# EAGLE board DMXtoMotionPCB-v2 (EAGLE 7.5.0)
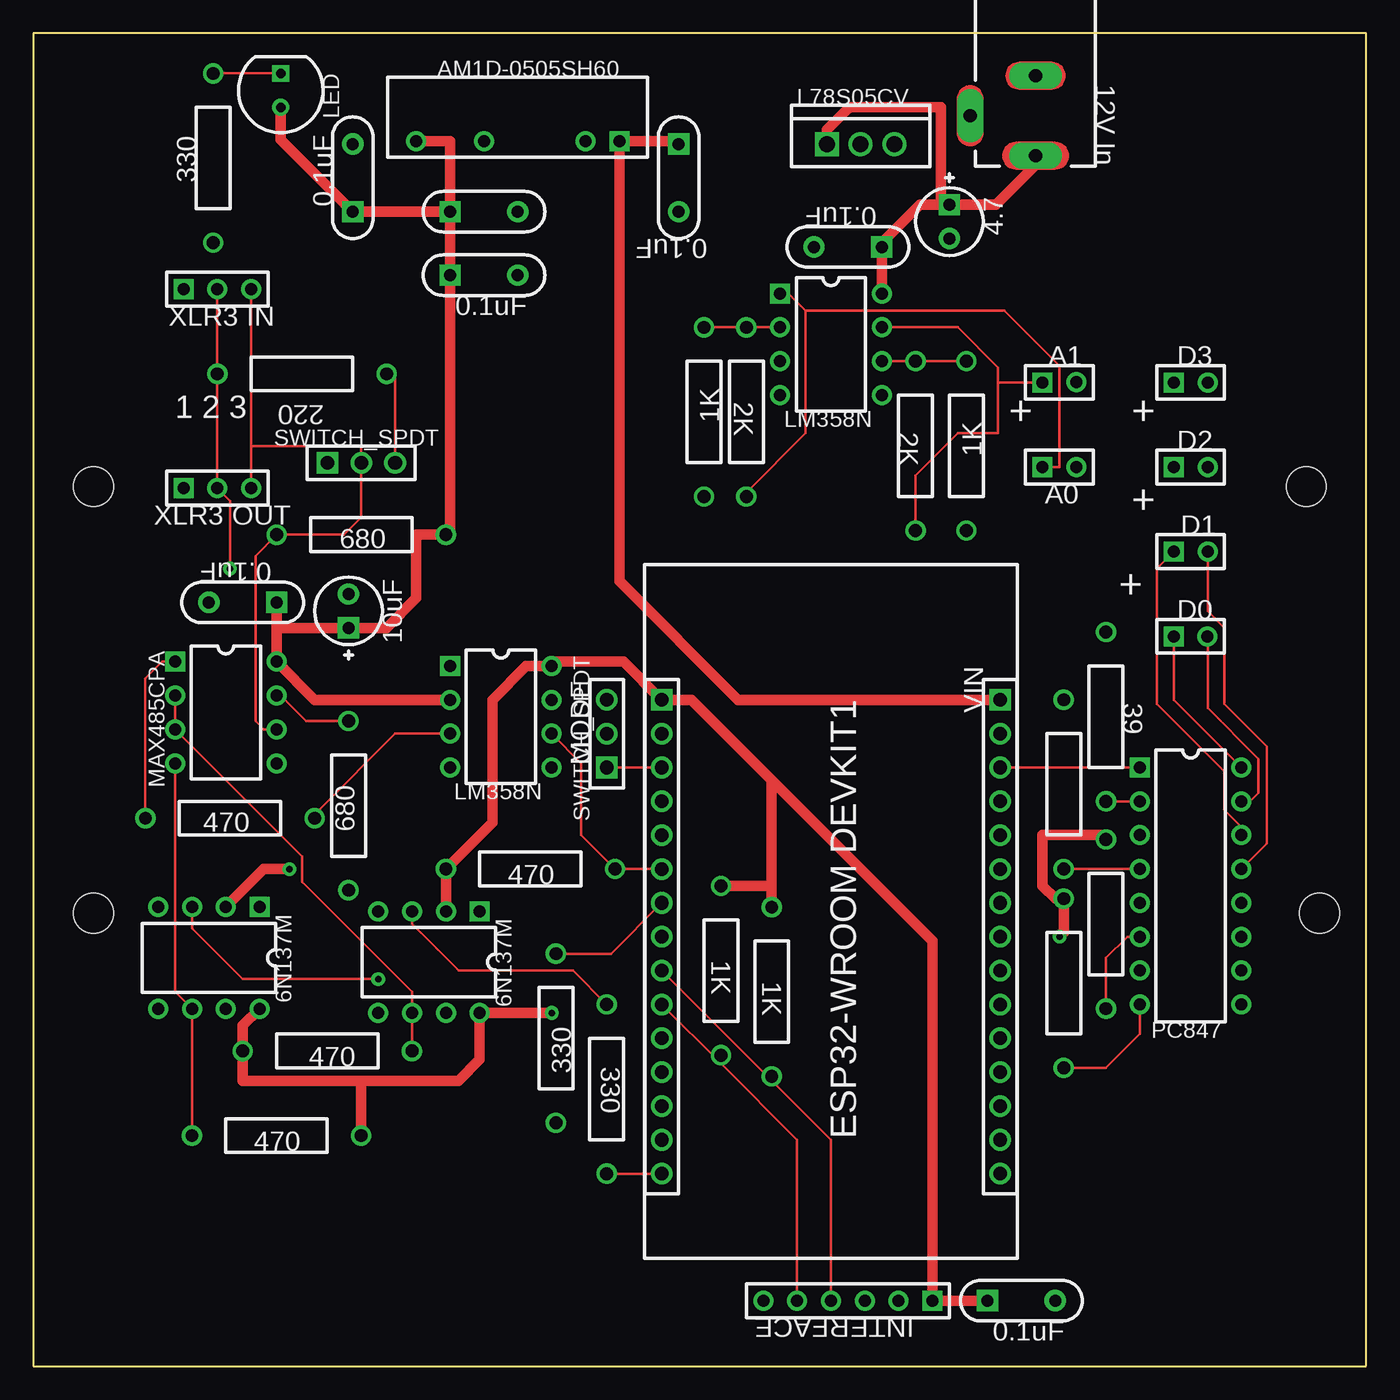
[diagram p0: board, top side]
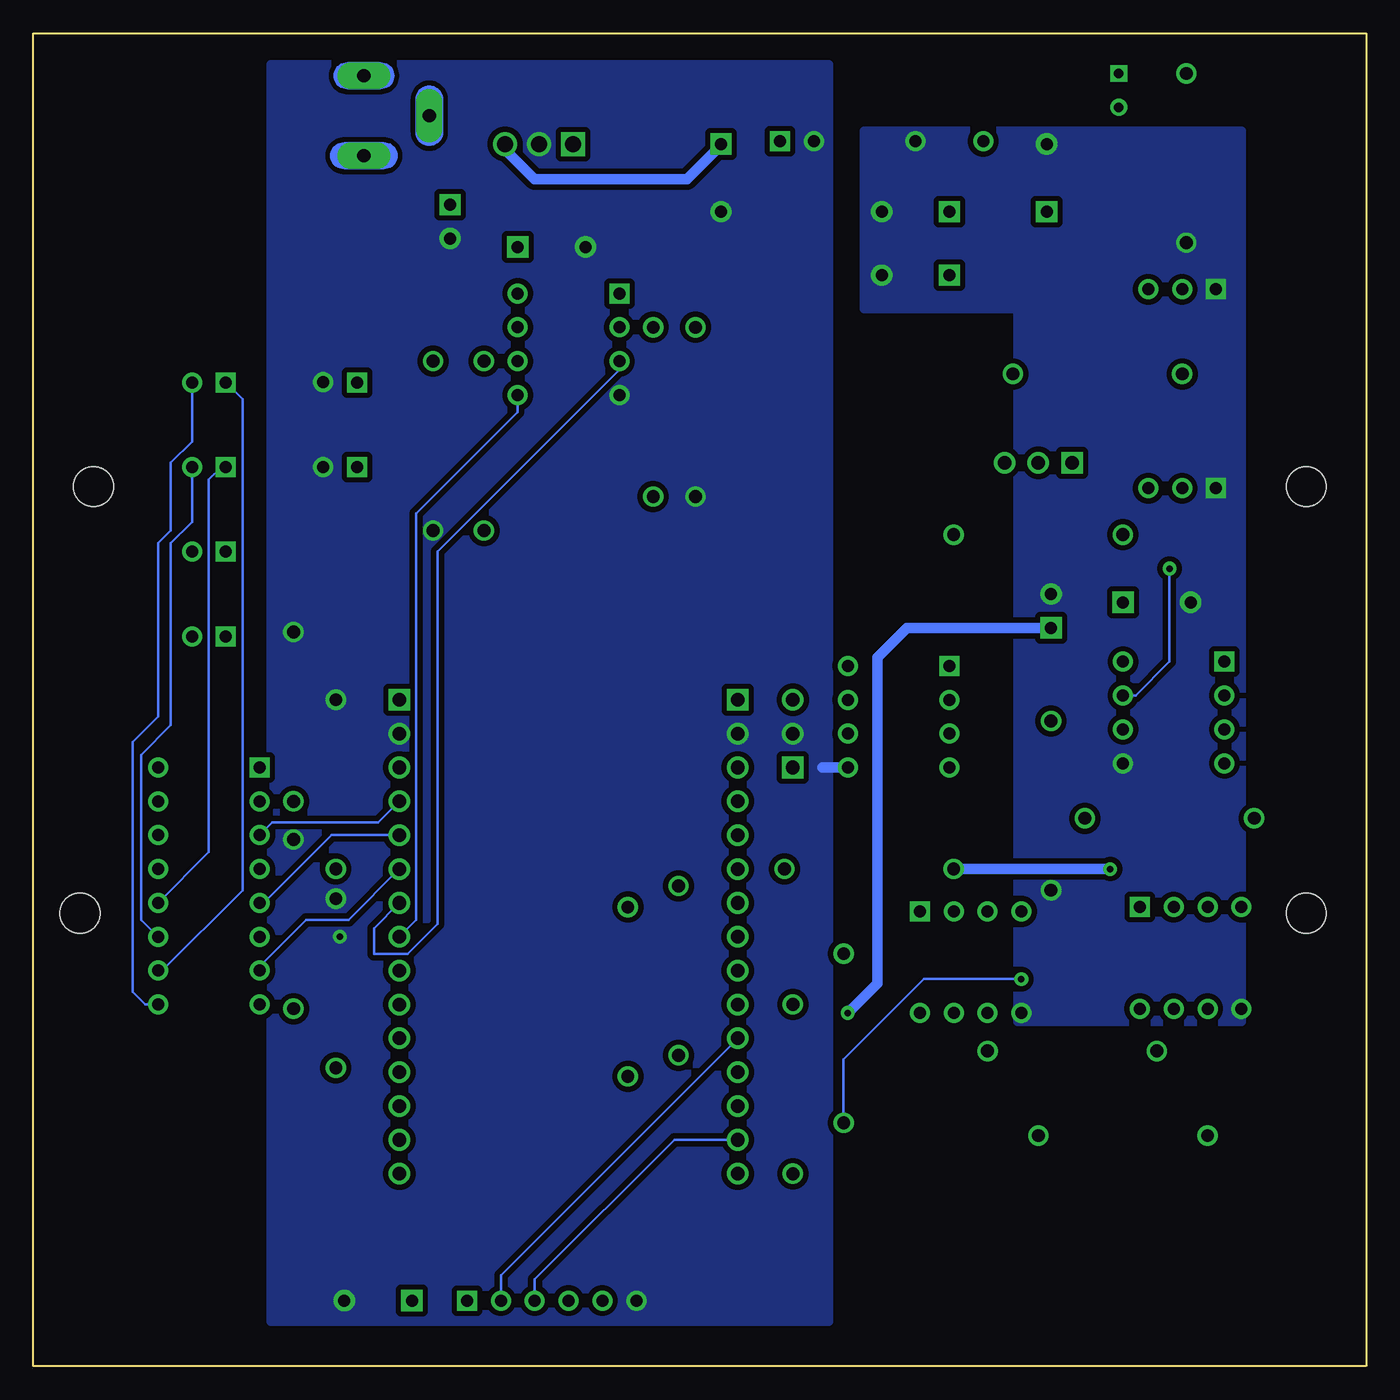
[diagram p1: board, bottom side, seen from below]

Size 100 x 100 mm. Coordinates in mm from the lower left corner, seen from the top.
Outline: 0,100 0,0 100,0 100,100 0,100
Copper layers (1*16): Top 0.035mm / dielectric 1.5mm / Bottom 0.035mm
Design rules "default *": minimum track width 10mil, minimum drill 0.61mm, track to track 8mil, track to pad 8mil, pad to pad 8mil, via to via 8mil, smd to smd 8mil, copper to edge 40mil, drill to drill 8mil, minimum pad ring 0mil, minimum via ring 8mil, stop-mask expansion 2mil, vias tented up to drill 19mil, thermal gap 10mil
Net classes: 0 Default: width 0.2 mm, clearance 0.2 mm, clearance 0.2 mm to class 1; 1 POWER: width 0.8 mm, clearance 0.4 mm, clearance 0.4 mm to class 0
Holes 3 mm at 4.5,66 4.5,34 95.5,66 96.5,34

## Footprints (pad centres in the part's own frame; a part is rotated, then mirrored left to right if it is on the bottom)
CAP-5.08/9.15x3 = drill 0.9 pad 1.6 square: 1 -2.54,0 | drill 0.9 pad 1.6: 2 2.54,0
CAP-5.08/9.15x3_C2 = drill 0.9 pad 1.6 square: 1 -2.54,0 | drill 0.9 pad 1.6: 2 2.54,0
CAP-5.08/9.15x3_C3 = drill 0.9 pad 1.6 square: 1 -2.54,0 | drill 0.9 pad 1.6: 2 2.54,0
CAPPR-2.54/5.08 = drill 0.9 pad 1.6 square: 1 -1.27,0 | drill 0.9 pad 1.6: 2 1.27,0
CAPPR-2.54/5.08_C5 = drill 0.9 pad 1.6 square: 1 -1.27,0 | drill 0.9 pad 1.6: 2 1.27,0
CAP-5.08/9.15x3_C9 = drill 0.9 pad 1.6 square: 1 -2.54,0 | drill 0.9 pad 1.6: 2 2.54,0
LED100 = drill 0.711 pad 1.27 square: 1 -1.27,0 | drill 0.711 pad 1.27: 2 1.27,0
4840-2211 = drill 1 pad 2 long: 1 3,1.7; 2 -3,1.7; 3 0,-3.2
HDR-1x3 = drill 0.9 pad 1.5 square: 1 -2.54,0 | drill 0.9 pad 1.5: 2 0,0; 3 2.54,0
HDR-1x2 = drill 0.9 pad 1.5 square: 1 -1.27,0 | drill 0.9 pad 1.5: 2 1.27,0
HDR-1x6 = drill 0.9 pad 1.5 square: 1 -6.35,0 | drill 0.9 pad 1.5: 2 -3.81,0; 3 -1.27,0; 4 1.27,0; 5 3.81,0; 6 6.35,0
HDR-1x2_J6 = drill 0.9 pad 1.5 square: 1 -1.27,0 | drill 0.9 pad 1.5: 2 1.27,0
RES-12.7/7.6x2.5 = drill 0.965 pad 1.524: 1 -6.35,0; 2 6.35,0
RES-12.7/7.6x2.5_R2 = drill 0.965 pad 1.524: 1 -6.35,0; 2 6.35,0
RES-12.7/7.6x2.5_R3 = drill 0.965 pad 1.524: 1 -6.35,0; 2 6.35,0
RES-12.7/7.6x2.5_R9 = drill 0.965 pad 1.524: 1 -6.35,0; 2 6.35,0
RES-12.7/7.6x2.5_R12 = drill 0.965 pad 1.524: 1 -6.35,0; 2 6.35,0
RES-12.7/7.6x2.5_R14 = drill 0.965 pad 1.524: 1 -6.35,0; 2 6.35,0
HDRF-1x3T/2.54/8x3 = drill 1.02 pad 1.62 square: 1 -2.54,0 | drill 1.02 pad 1.62: 2 0,0; 3 2.54,0
SIP-4(7)/19.5x6x2.54 = drill 0.9 pad 1.5 square: 1 -7.62,0 | drill 0.9 pad 1.5: 2 -5.08,0; 5 2.54,0; 7 7.62,0
DIP-8 = drill 0.9 pad 1.5 square: 1 -3.81,3.81 | drill 0.9 pad 1.5: 2 -3.81,1.27; 3 -3.81,-1.27; 4 -3.81,-3.81; 5 3.81,-3.81; 6 3.81,-1.27; 7 3.81,1.27; 8 3.81,3.81
TO-220V = drill 1.2 pad 1.8 square: 1 -2.54,0 | drill 1.2 pad 1.8: 2 2.54,0; 3 0,0
DIP-8_U5 = drill 0.9 pad 1.5 square: 1 -3.81,3.81 | drill 0.9 pad 1.5: 2 -3.81,1.27; 3 -3.81,-1.27; 4 -3.81,-3.81; 5 3.81,-3.81; 6 3.81,-1.27; 7 3.81,1.27; 8 3.81,3.81
ESP32-DEVKITV1 = drill 1.02 pad 1.62 square: 1 -17.78,-12.7; 30 -17.78,12.7 | drill 1.02 pad 1.62: 2 -15.24,-12.7; 3 -12.7,-12.7; 4 -10.16,-12.7; 5 -7.62,-12.7; 6 -5.08,-12.7; 7 -2.54,-12.7; 8 0,-12.7; 9 2.54,-12.7; 10 5.08,-12.7; 11 7.62,-12.7; 12 10.16,-12.7; 13 12.7,-12.7; 14 15.24,-12.7; 15 17.78,-12.7; 16 17.78,12.7; 17 15.24,12.7; 18 12.7,12.7; 19 10.16,12.7; 20 7.62,12.7; 21 5.08,12.7; 22 2.54,12.7; 23 0,12.7; 24 -2.54,12.7; 25 -5.08,12.7; 26 -7.62,12.7; 27 -10.16,12.7; 28 -12.7,12.7; 29 -15.24,12.7
DIP-8_VO2 = drill 0.9 pad 1.5 square: 1 -3.81,3.81 | drill 0.9 pad 1.5: 2 -3.81,1.27; 3 -3.81,-1.27; 4 -3.81,-3.81; 5 3.81,-3.81; 6 3.81,-1.27; 7 3.81,1.27; 8 3.81,3.81
DIP-16 = drill 0.9 pad 1.5 square: 1 -3.81,8.89 | drill 0.9 pad 1.5: 2 -3.81,6.35; 3 -3.81,3.81; 4 -3.81,1.27; 5 -3.81,-1.27; 6 -3.81,-3.81; 7 -3.81,-6.35; 8 -3.81,-8.89; 9 3.81,-8.89; 10 3.81,-6.35; 11 3.81,-3.81; 12 3.81,-1.27; 13 3.81,1.27; 14 3.81,3.81; 15 3.81,6.35; 16 3.81,8.89

## Placement (x,y rotation side)
C1  0.1uF  [CAP-5.08/9.15x3]  23.96,89.16 90 top
C2  0.1uF  [CAP-5.08/9.15x3_C2]  33.81,86.62 0 top
C3  0.1uF  [CAP-5.08/9.15x3_C3]  33.81,81.86 0 top
C4  4.7  [CAPPR-2.54/5.08]  68.73,85.88 270 top
C5  10uF  [CAPPR-2.54/5.08_C5]  23.65,56.67 90 top
C6  0.1uF  [CAP-5.08/9.15x3_C3]  61.11,83.97 180 top
C7  0.1uF  [CAP-5.08/9.15x3_C3]  74.13,4.91 0 top
C8  0.1uF  [CAP-5.08/9.15x3_C3]  15.71,57.3 180 top
C9  0.1uF  [CAP-5.08/9.15x3_C9]  48.41,89.16 270 top
D1  LED  [LED100]  18.57,95.72 270 top
J1  12V In  [4840-2211]  73.5,93.81 270 top
J2  XLR3 IN  [HDR-1x3]  13.8,80.8 0 top
J3  XLR3 OUT  [HDR-1x3]  13.8,65.88 0 top
J4  D1  [HDR-1x2]  86.83,61.11 0 top
J5  INTERFACE  [HDR-1x6]  61.11,4.91 180 top
J6  A0  [HDR-1x2_J6]  76.99,67.46 0 top
J7  A1  [HDR-1x2]  76.99,73.81 0 top
J8  D0  [HDR-1x2]  86.83,54.76 0 top
J9  D3  [HDR-1x2]  86.83,73.81 0 top
J10  D2  [HDR-1x2]  86.83,67.46 0 top
R1  330  [RES-12.7/7.6x2.5]  13.49,90.64 270 top
R2  330  [RES-12.7/7.6x2.5_R2]  39.2,24.6 90 top
R3  330  [RES-12.7/7.6x2.5_R3]  43.02,20.79 270 top
R4  470  [RES-12.7/7.6x2.5]  14.76,41.11 0 top
R5  470  [RES-12.7/7.6x2.5]  18.25,17.3 0 top
R6  470  [RES-12.7/7.6x2.5]  22.06,23.65 0 top
R7  680  [RES-12.7/7.6x2.5]  24.6,62.38 0 top
R8  680  [RES-12.7/7.6x2.5_R3]  23.65,42.06 90 top
R9  1K  [RES-12.7/7.6x2.5_R9]  51.59,29.68 270 top
R10  1K  [RES-12.7/7.6x2.5_R9]  55.4,28.09 270 top
R12  220  [RES-12.7/7.6x2.5_R12]  20.16,74.45 180 top
R13  470  [RES-12.7/7.6x2.5]  37.3,37.3 0 top
R14  39  [RES-12.7/7.6x2.5_R14]  77.31,43.65 270 top
R15  39  [RES-12.7/7.6x2.5_R14]  80.48,33.17 270 top
R16  39  [RES-12.7/7.6x2.5_R14]  77.31,28.73 270 top
R17  39  [RES-12.7/7.6x2.5_R3]  80.48,48.73 270 top
R18  1K  [RES-12.7/7.6x2.5]  70,69.05 90 top
R19  2K  [RES-12.7/7.6x2.5]  66.19,69.05 270 top
R20  1K  [RES-12.7/7.6x2.5]  50.32,71.59 90 top
R21  2K  [RES-12.7/7.6x2.5]  53.49,71.59 270 top
S3  SWITCH_SPDT  [HDRF-1x3T/2.54/8x3]  24.6,67.78 0 top
S4  MODE  [HDRF-1x3T/2.54/8x3]  43.02,47.46 90 top
U1  AM1D-0505SH60  [SIP-4(7)/19.5x6x2.54]  36.35,91.91 180 top
U2  MAX485CPA  [DIP-8]  14.44,49.05 0 top
U4  L78S05CV  [TO-220V]  62.06,91.7 0 top
U5  LM358N  [DIP-8_U5]  59.84,76.67 0 top
uC1  ESP32-WROOM-DEVKITV1  [ESP32-DEVKITV1]  59.84,32.22 270 top
VO1  6N137M  [DIP-8_U5]  35.08,48.73 0 top
VO2  6N137M  [DIP-8_VO2]  13.17,30.63 270 top
VO3  6N137M  [DIP-8_VO2]  29.68,30.32 270 top
VO4  PC847  [DIP-16]  86.83,36.03 0 top

## Library data of the parts
C1-C3 C6-C9 = common; DESCRIPTION: Non-polarized
C4 C5 D1 J2-J10 R1-R10 R12-R21 = common
J1 = common; DATASHEET: http://datasheets.diptrace.com/con_power/typ_4840.2201.pdf; MANUFACTURER: Schurter
S3 S4 = common; DESCRIPTION: Switch; UNTITLED: Normally Closed
U1 = common; MANUFACTURER: AMTEC
U2 = common; DATASHEET: http://datasheets.diptrace.com/maxim/MAX1487-MAX491.pdf; MANUFACTURER: Maxim
U4 = common; DATASHEET: http://datasheets.diptrace.com/st_micro/CD00000449.pdf; MANUFACTURER: ST Microelectronics
U5 = common; DATASHEET: http://datasheets.diptrace.com/motorola/LM158_258_358_2904.pdf; MANUFACTURER: Motorola
uC1 = common; DATASHEET: https://www.espressif.com/sites/default/files/documentation/esp32-wroom-32_datasheet_en.pdf
VO1-VO3 = common; DATASHEET: http://datasheets.diptrace.com/optoisolators/6N137M.pdf; MANUFACTURER: Fairchild
VO4 = common; DATASHEET: http://datasheets.diptrace.com/misc/PC817_Series.pdf; MANUFACTURER: Sharp

## Nets
3.3V_ESP [POWER]: C7.1 J5.1 R9.1 R10.1 R13.1 uC1.1 VO1.8 VO2.2 VO3.2
5V [POWER]: C9.1 U1.1 U4.2 uC1.30
12V [POWER]: C4.1 C6.1 J1.1 U4.1 U5.8
But1: J5.4 R10.2 uC1.9
But2: J5.5 R9.2 uC1.10
GND [POWER]: C4.2 C6.2 C7.2 C9.2 J1.2 J5.6 J6.2 J7.2 R14.1 R15.1 R16.1 R17.1 R18.1 R20.1 S4.2 U1.2 U4.3 U5.4 uC1.2 uC1.29 VO1.5
ISO-5V [POWER]: C1.1 C2.1 C3.1 C5.1 C8.1 D1.2 R5.2 R6.1 R7.2 U1.7 U2.8 VO1.2 VO2.8 VO3.8
ISO-GND [POWER]: C1.2 C2.2 C3.2 C5.2 C8.2 J2.1 J3.1 R1.2 R8.1 U1.5 U2.5 VO2.5 VO3.5
Net_0: R17.2 VO4.2
Net_1: uC1.26 VO4.5
Net_2: uC1.25 VO4.7
Net_4: D1.1 R1.1
Net_6: uC1.28 VO4.1
Net_7: uC1.27 VO4.3
Net_8: U5.5 uC1.23
Net_9: R2.1 VO2.3
Net_10: R3.2 uC1.15
Net_11: R3.1 VO3.3
Net_12: R4.2 VO1.3
Net_13: R4.1 U2.1
Net_14: R6.2 U2.2 U2.3 VO3.6
Net_15: R5.1 U2.4 VO2.6
Net_16: J2.2 J3.2 R8.2 R12.2 U2.7
Net_17: J2.3 J3.3 R7.1 S3.2 U2.6
Net_18: J7.1 R19.2 U5.7
Net_21: R18.2 R19.1 U5.6
Net_22: S4.1 uC1.3
Net_24: U5.3 uC1.24
Net_32: J5.2 uC1.11
Net_33: J5.3 uC1.14
Net_34: R12.1 S3.3
Net_35: R14.2 VO4.4
Net_36: R15.2 VO4.6
Net_37: R16.2 VO4.8
Net_38: J8.2 VO4.15
Net_39: J8.1 VO4.16
Net_40: J4.1 VO4.14
Net_41: J4.2 VO4.13
Net_42: J10.1 VO4.12
Net_43: J10.2 VO4.11
Net_44: J9.1 VO4.10
Net_45: J9.2 VO4.9
Net_46: J6.1 R21.2 U5.1
Net_47: R20.2 R21.1 U5.2
RX: R13.2 uC1.6 VO1.6
TX: R2.2 uC1.7

## Tracks (layer width: path | path; a pad name or v marks a point on that pad's centre or on a via)
3.3V_ESP  (via drill 0.49 pad 1.02)
  Top 0.8: 55.4,43.97 49.37,50 uC1.1 44.28,52.86 38.89,52.86 VO1.8 36.98,52.54 34.44,50 34.44,40.79 R13.1 VO3.2 | 55.4,43.97 67.46,31.9 J5.1 C7.1 | C7.1 | v19.2,37.3 17.3,37.3 VO2.2 | 55.4,43.97 R10.1 55.4,36.03 R9.1
  Bottom 0.8: R13.1 v19.2,37.3 | v19.2,37.3
5V
  Top 0.8: C9.1 48.2,91.91 U1.1 43.97,58.89 52.86,50 uC1.30
  Bottom 0.8: U4.2 64.61,91.28 62.38,89.05 50.95,89.05 48.41,91.59 C9.1
12V
  Top 0.8: C4.1 72.22,87.15 75.19,90.12 J1.1 | U4.1 59.52,92.75 61.22,94.45 68.1,94.45 68.1,87.15 C4.1 | U5.8 C6.1 63.65,84.29 66.51,87.15 C4.1
But1
  Top 0.2: J5.4 59.84,16.98 55.39,21.44 | 55.39,21.44 uC1.9 | R10.2 55.39,21.44
But2
  Top 0.2: J5.5 57.3,16.98 51.58,22.7 | 51.58,22.7 uC1.10 | R9.2 51.58,22.7
GND  (via drill 0.49 pad 1.02)
  Top 0.8: R15.1 80.16,39.84 75.72,39.84 75.72,36.03 76.67,35.08 R16.1 77.31,32.54 v76.99,32.22
  Bottom 0.8: VO1.5 40.79,44.92
  pour Bottom (isolate 0.33, no thermals): 82.18,97.68 40.32,97.68 40.32,3.32 82.18,3.32
ISO-5V  (via drill 0.49 pad 1.02)
  Top 0.8: C2.1 C3.1 31.27,62.7 R7.2 | C2.1 C1.1 | C1.1 | C2.1 31.27,91.91 U1.7 | R7.2 | R7.2 28.73,62.38 28.73,57.62 26.5,55.4 C5.1 18.25,55.4 C8.1 U2.8 21.11,50 VO1.2 | VO2.8 15.71,25.55 R6.1 15.71,21.43 24.6,21.43 | 24.6,21.43 31.9,21.43 33.49,23.01 VO3.8 | R5.2 24.6,21.43 | v38.89,26.5 VO3.8 | VO3.8 | D1.2 18.57,92.02 C1.1
  Bottom 0.8: C5.1 34.44,55.4 36.66,53.17 36.66,28.73 v38.89,26.5
ISO-GND
  pour Bottom (isolate 0.33, no thermals): 37.68,92.68 37.68,79.32 26.18,79.32 26.18,25.82 9.32,25.82 9.32,92.68
Net_0
  Top 0.2: VO4.2 R17.2 | R17.2
Net_1
  Bottom 0.2: VO4.5 82.7,34.76 77.62,39.84 uC1.26
Net_2
  Bottom 0.2: VO4.7 83.02,30 79.53,33.49 76.35,33.49 uC1.25
Net_4
  Top 0.2: R1.1 D1.1 | D1.1
Net_6
  Top 0.2: VO4.1 uC1.28 | uC1.28
Net_7
  Bottom 0.2: VO4.3 82.07,40.79 74.13,40.79 uC1.27
Net_8
  Bottom 0.2: U5.5 63.65,71.59 71.27,63.97 71.27,33.49 uC1.23
Net_9  (via drill 0.49 pad 1.02)
  Top 0.2: VO2.3 11.9,32.86 15.71,29.05 v25.87,29.05
  Bottom 0.2: v25.87,29.05 33.17,29.05 39.2,23.01 R2.1
Net_10
  Top 0.2: R3.2 uC1.15 | uC1.15
Net_11
  Top 0.2: VO3.3 28.41,33.17 31.9,29.68 40.48,29.68 R3.1
Net_12
  Top 0.2: VO1.3 27.14,47.46 21.43,41.74 21.43,41.53 21.11,41.22 R4.2
Net_13
  Top 0.2: R4.1 8.41,51.59 9.68,52.86 U2.1
Net_14
  Top 0.2: U2.2 U2.3 20.16,38.25 20.16,36.35 28.41,28.09 VO3.6 R6.2
Net_15
  Top 0.2: U2.4 10.63,28.09 VO2.6 R5.1
Net_16  (via drill 0.49 pad 1.02)
  Top 0.2: J2.2 R12.2 J3.2 14.76,64.92 v14.76,59.84 | U2.7 18.57,50.32 20.47,48.41 R8.2
  Bottom 0.2: U2.7 17.3,50.32 14.76,52.86 v14.76,59.84
Net_17
  Top 0.2: J2.3 16.34,69.05 | 16.34,69.05 J3.3 | 16.34,69.05 24.6,69.05 S3.2 24.6,63.65 23.33,62.38 R7.1 16.66,60.8 16.66,48.41 17.3,47.78 U2.6
Net_18
  Top 0.2: R19.2 66.19,66.83 69.37,70 72.37,70 72.37,73.81 | 72.37,73.81 J7.1 | U5.7 69.37,77.94 72.37,74.93 72.37,73.81
Net_21
  Top 0.2: U5.6 R19.1 | R19.1 | R18.2 R19.1 | R19.1
Net_22
  Top 0.2: uC1.3 S4.1 | S4.1
Net_24
  Bottom 0.2: uC1.24 74.45,32.86 74.45,30.95 71.91,30.95 69.69,33.17 69.69,61.11 56.03,74.77 U5.3
Net_32
  Bottom 0.2: J5.2 64.92,6.82 uC1.11
Net_33
  Bottom 0.2: J5.3 62.38,6.5 51.91,16.98 uC1.14
Net_34
  Top 0.2: S3.3 27.14,74.45 R12.1
Net_35
  Top 0.2: VO4.4 R14.2 | R14.2
Net_36
  Top 0.2: VO4.6 82.07,32.22 80.48,30.63 R15.2
Net_37
  Top 0.2: VO4.8 83.02,24.92 80.48,22.38 R16.2
Net_38
  Top 0.2: VO4.15 91.28,42.38 91.91,43.02 91.91,45.55 88.1,49.37 J8.2
Net_39
  Top 0.2: J8.1 85.56,50 VO4.16
Net_40
  Top 0.2: VO4.14 90.64,40.48 89.37,41.74 89.37,44.6 84.29,49.68 84.29,59.84 J4.1
Net_41
  Top 0.2: J4.2 88.1,56.67 89.37,55.4 89.37,49.68 92.55,46.51 92.55,39.2 VO4.13
Net_42
  Bottom 0.2: J10.1 85.88,67.46 86.83,66.51 86.83,38.57 VO4.12
Net_43
  Bottom 0.2: J10.2 88.1,63.34 89.69,61.75 89.69,48.09 91.91,45.87 91.91,33.49 VO4.11
Net_44
  Bottom 0.2: VO4.10 90.32,29.68 84.29,35.71 84.29,72.54 J9.1
Net_45
  Bottom 0.2: J9.2 88.1,69.37 89.69,67.78 89.69,62.7 90.64,61.75 90.64,48.73 92.55,46.83 92.55,28.09 91.59,27.14 VO4.9
Net_46
  Top 0.2: R21.2 53.49,65.56 57.94,70 57.94,79.21 | 57.94,79.21 72.86,79.21 76.99,75.08 76.99,67.46 J6.1 | 57.94,79.21 56.67,80.48 U5.1
Net_47
  Top 0.2: R21.1 U5.2 | U5.2 | R20.2 R21.1 | R21.1
RX
  Top 0.2: VO1.6 41.11,45.24 41.11,39.84 R13.2 uC1.6 | uC1.6
TX
  Top 0.2: R2.2 43.33,30.95 uC1.7

## Text on the board
tPlace: 12V In | 330 | 4.7 | 0.1uF | 0.1uF | 0.1uF | XLR3 IN | 0.1uF | A1 | D3 | 1 2 3 | + | + | 2K | 220 | 1K | 2K | D2 | 1K | A0 | + | XLR3 OUT | D1 | 680 | + | 0.1uF | D0 | 10uF | 39 | MODE | 470 | 680 | 470 | 1K | 1K | 470 | 330 | 330 | 470 | INTERFACE | 0.1uF